# Altium PCB TXW827-RGB888_GQ_XC001 V2.0.PcbDoc (part 1 of 2)
Units mm, origin at the board's own origin, x right, y up, seen from the top; angles counter-clockwise.
Board outline 100 x 93.19 mm, 2 copper layers (Top Layer, Bottom Layer); 214 components, 136 nets, 624 pads, 441 vias.
Unrouted connection lines stored in the file: 170.
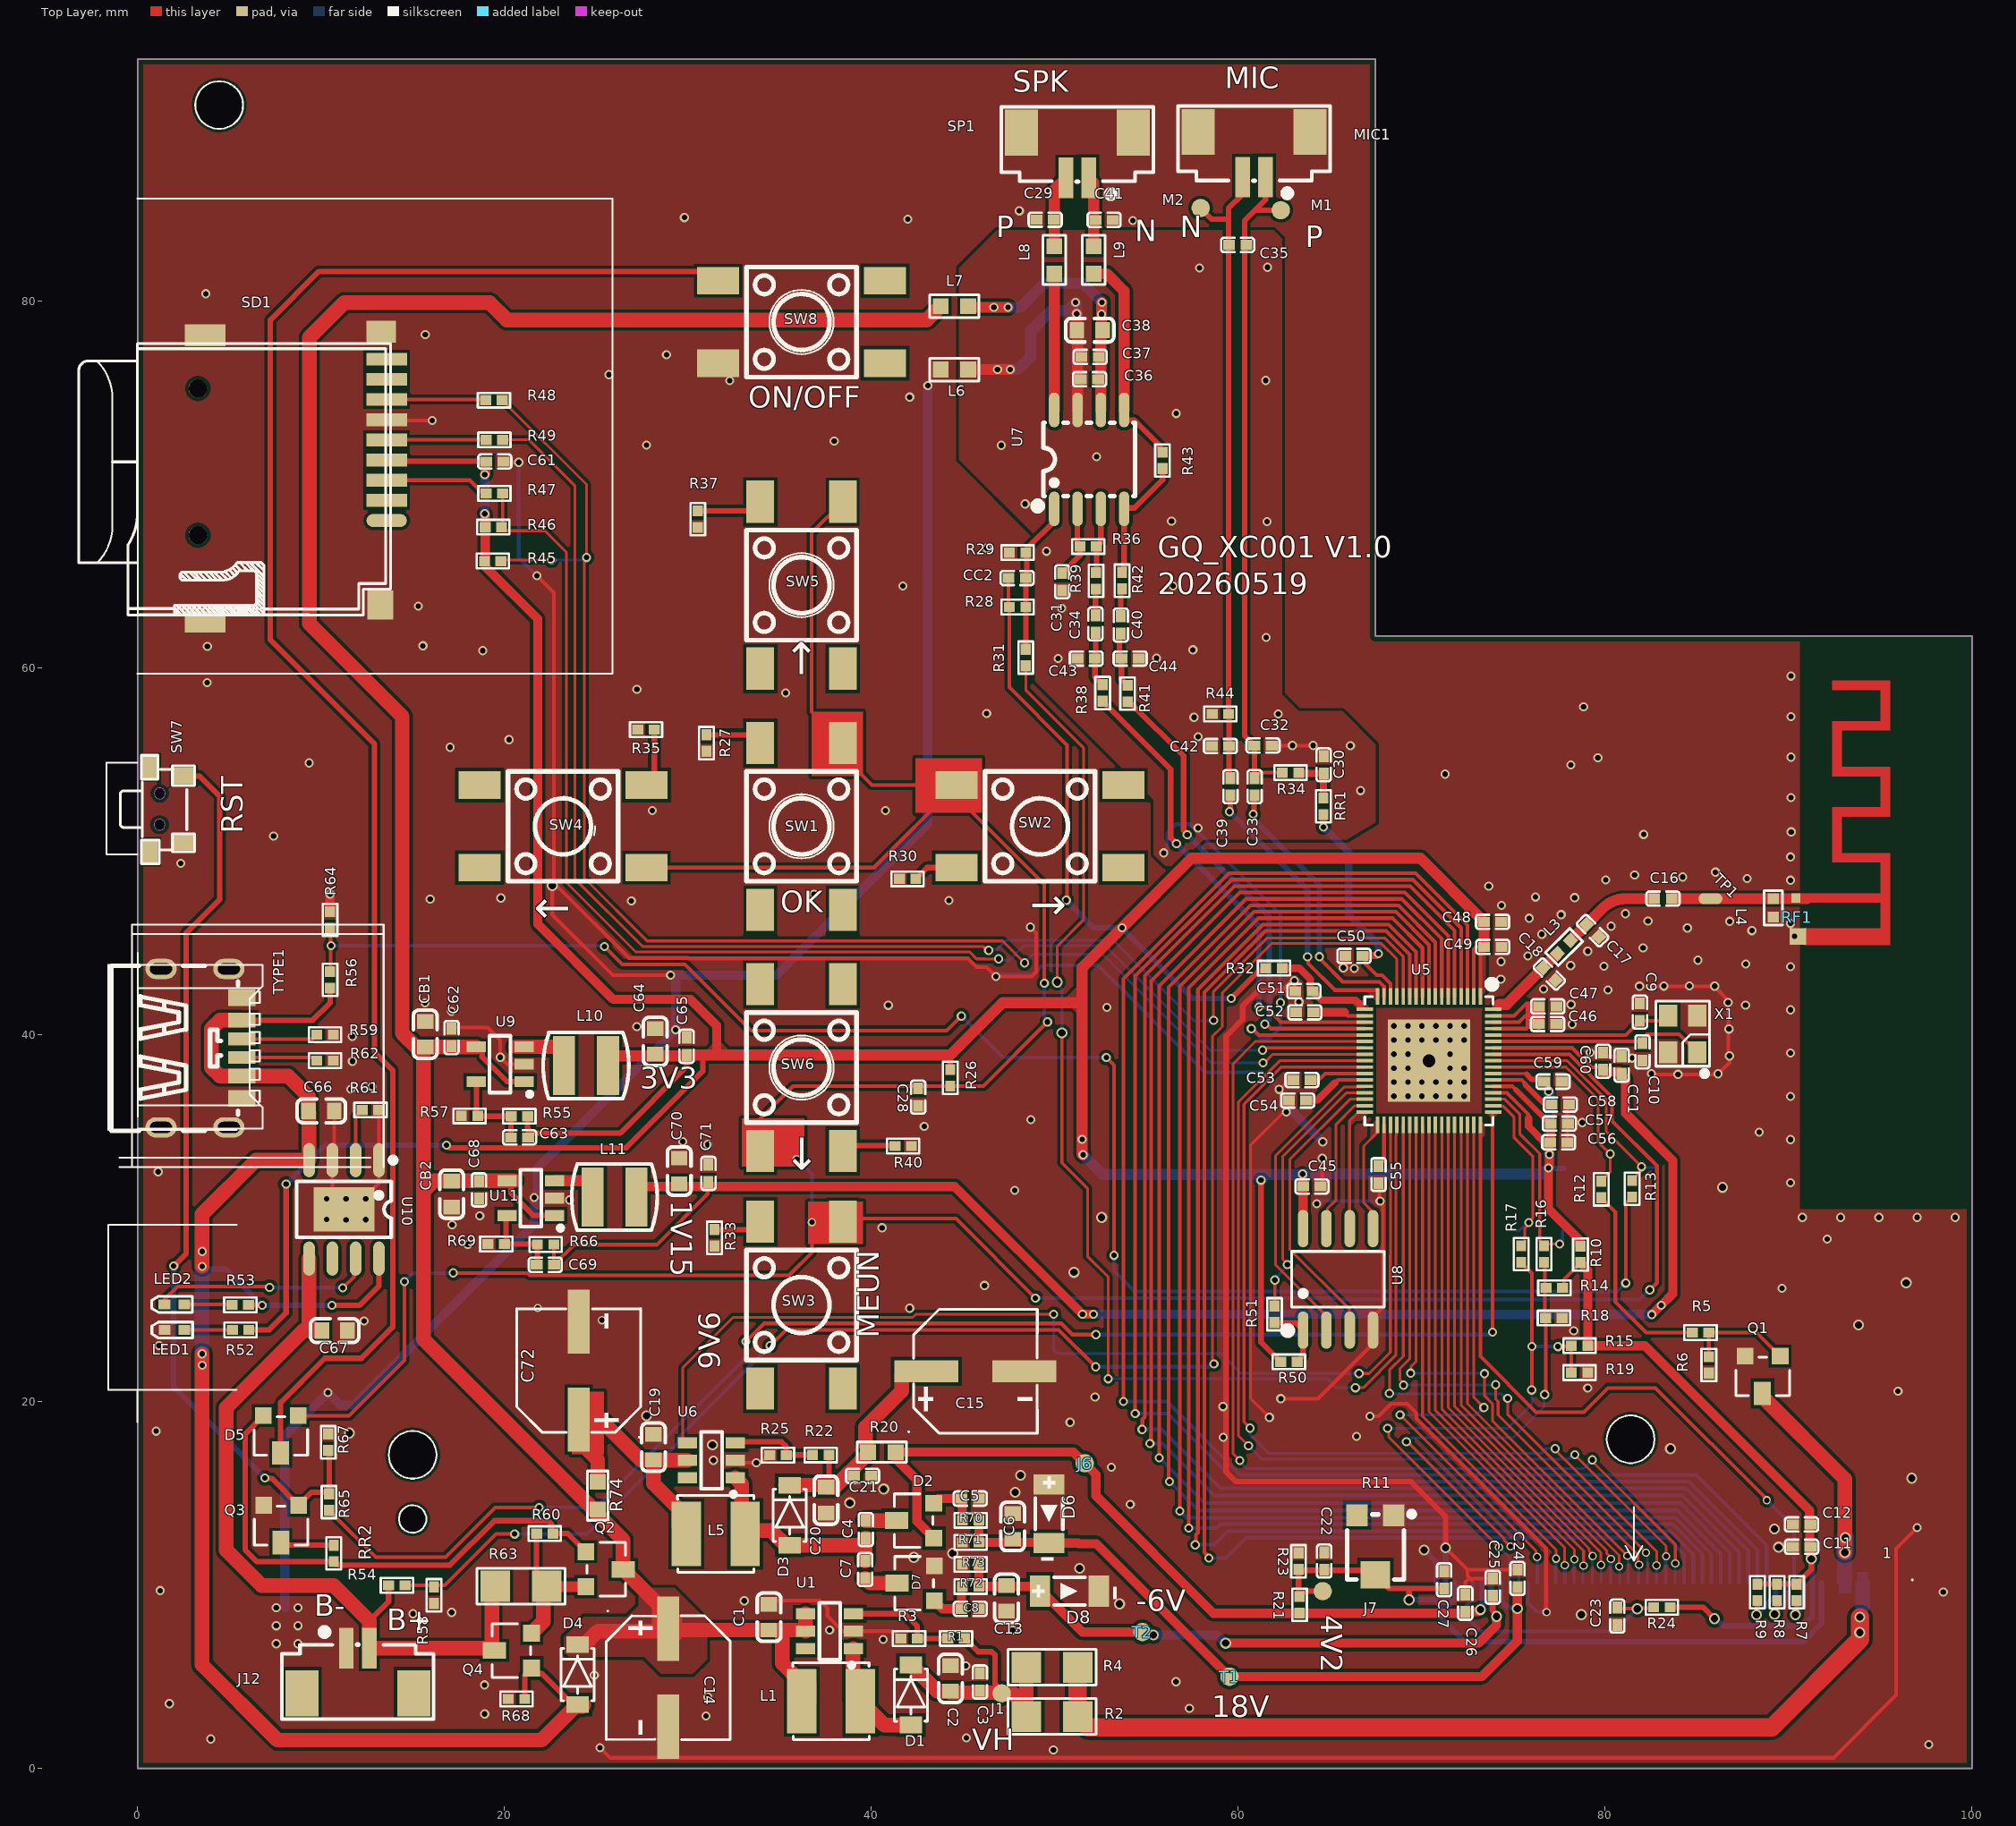
[diagram p0: Top Layer view]
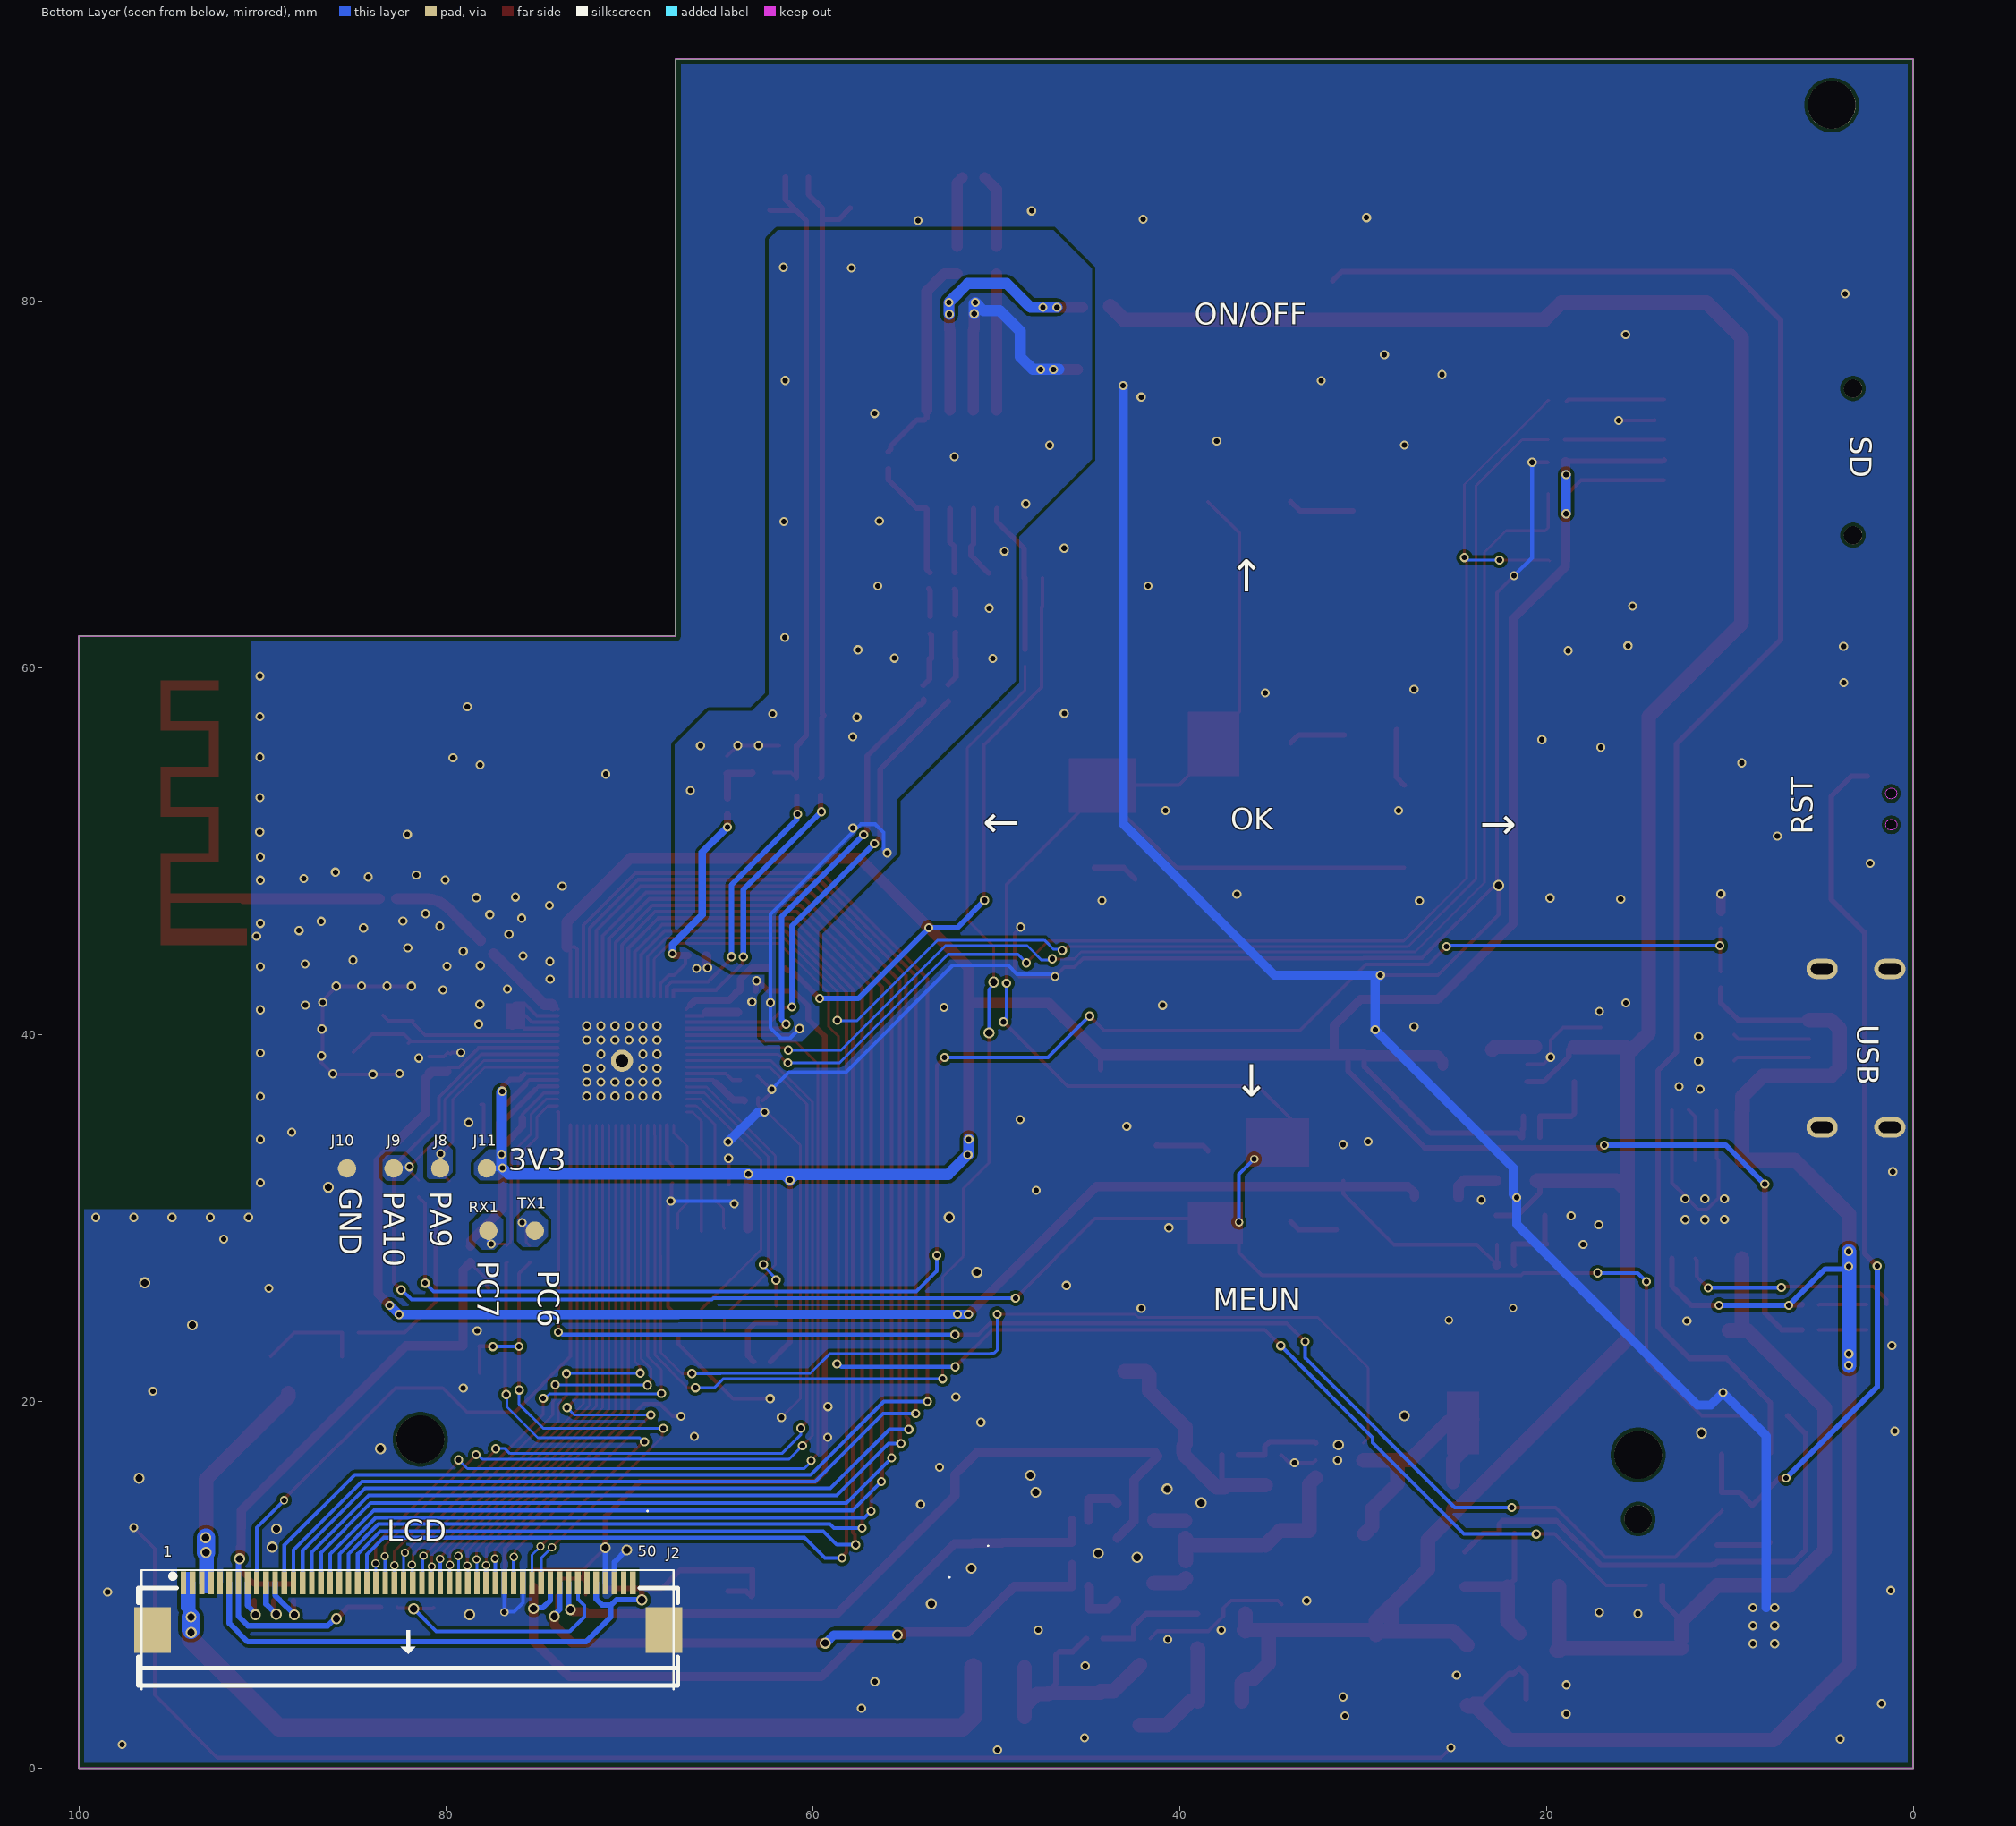
[diagram p1: Bottom Layer view, seen from below]
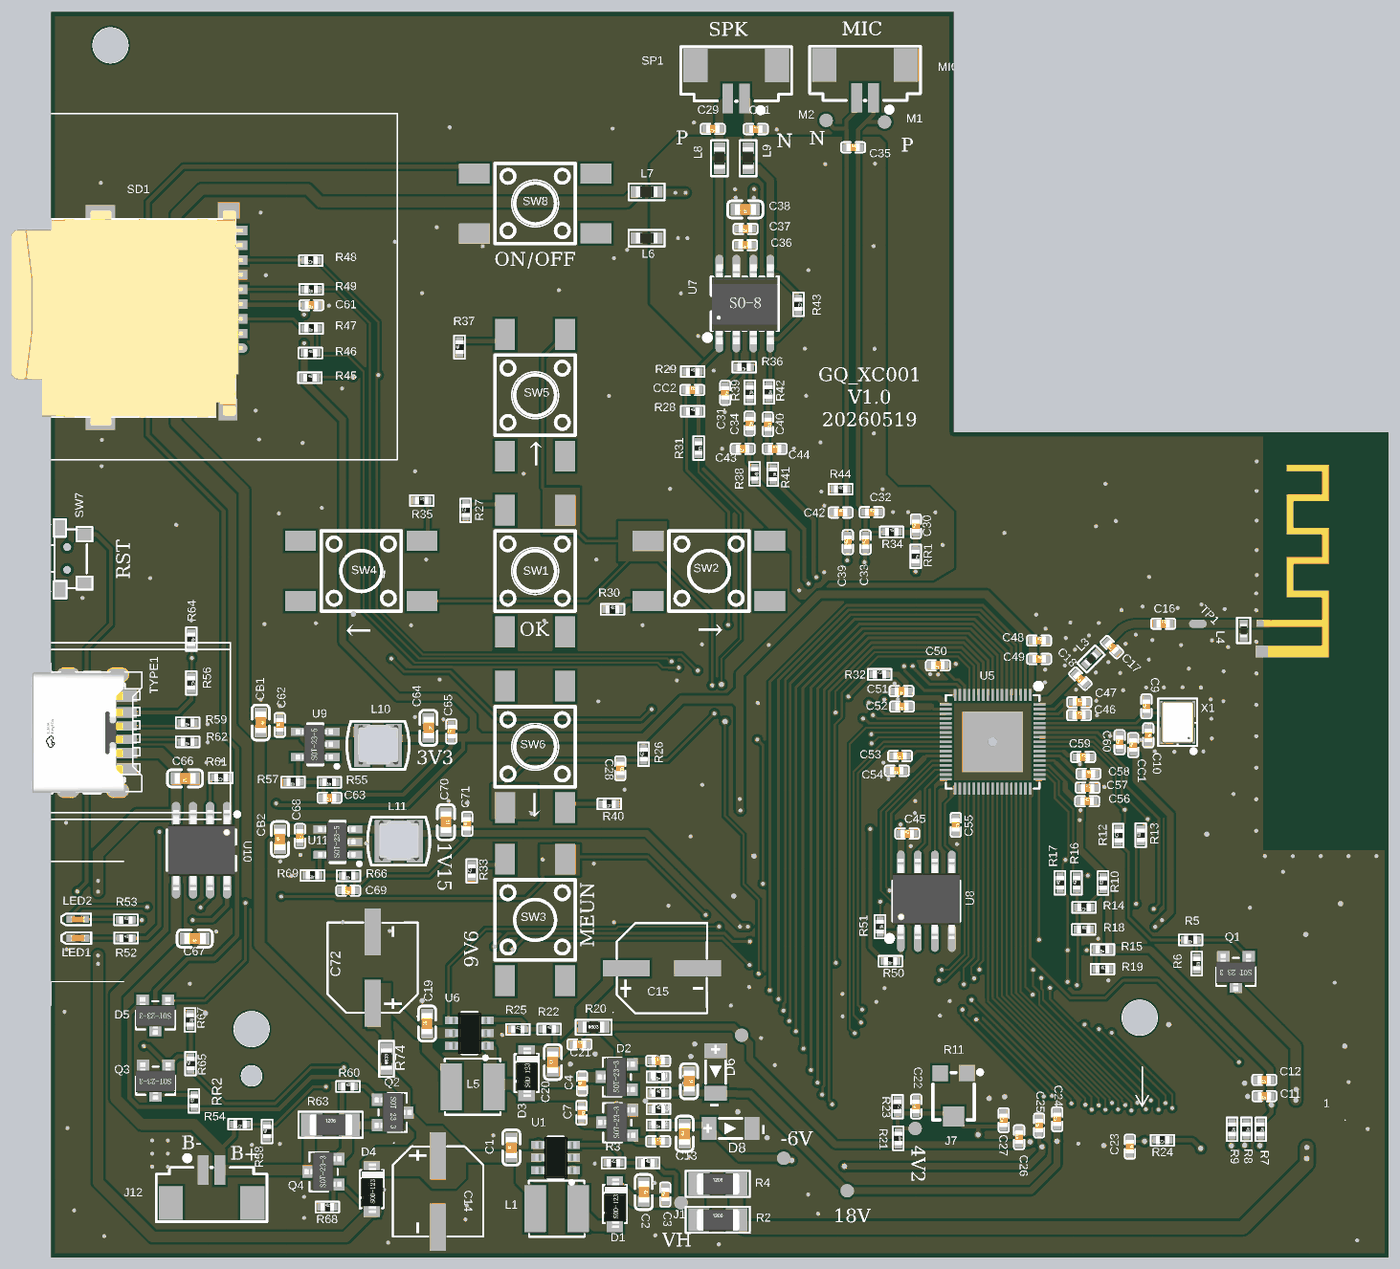
[diagram p3: 3D render of the assembled board from above, using the file's embedded part models]

## Layer stack, top to bottom
Top Solder: solder mask 0.0102, Solder Resist, Dk 3.5
Top Layer: signal copper 0.0356
Dielectric 1: dielectric 0.32, FR-4, Dk 4.8
Bottom Layer: signal copper 0.0356
Bottom Solder: solder mask 0.0102, Solder Resist, Dk 3.5

## Board outline
0,0 100,0 100,61.739 67.472,61.739 67.472,93.191 0,93.191

## Design rules (kind name [scope] priority, off if disabled: settings)
BoardOutlineClearance 铜到板边 [InNet('GND')] p1: gap=0.3 ignorepadtopadclearanceinfootprint=FALSE
Clearance 天线阻抗匹配-50Ω-2 [InNet('ANT2') vs InNet('GND')] p1: gap=0.14 ignorepadtopadclearanceinfootprint=TRUE
Clearance 天线阻抗匹配-50Ω-1 [InNet('ANT1') vs InNet('GND')] p2: gap=0.14 ignorepadtopadclearanceinfootprint=TRUE
Clearance 天线阻抗匹配-50Ω [InNet('ANT') vs InNet('GND')] p3: gap=0.14 ignorepadtopadclearanceinfootprint=FALSE // ANT_1mm板厚
Clearance 覆铜间距Clearance [InPolygon] p4: gap=0.18 ignorepadtopadclearanceinfootprint=FALSE
Clearance Clearance全局间距设置 [All] p5: gap=0.15 ignorepadtopadclearanceinfootprint=TRUE
Creepage 爬电间距 [All] p1: checkdistance=0.254
DiffPairsRouting [All] p1: maxlimit=0.5 minlimit=0.1 mostfreqgap=0.15 toplayer_minwidth=0.1 toplayer_maxwidth=0.5 toplayer_prefwidth=0.15 bottomlayer_minwidth=0.1 bottomlayer_maxwidth=0.5 bottomlayer_prefwidth=0.15 maxuncoupledlength=12.7
HoleSize [All] p1: absolutevalues=TRUE maxlimit=6 minlimit=0.1 maxpercent=80.000 minpercent=20.000
MinimumSolderMaskSliver [All] p1: minsoldermaskwidth=0.1
PlaneClearance [All] p1: clearance=0.254
PlaneConnect [All] p1: planeconnectstyle=Direct reliefexpansion=0.508 reliefentries=4 reliefconductorwidth=0.254 reliefairgap=0.254
PolygonConnect [All] p1: connectstyle=Direct reliefconductorwidth=0.254 reliefentries=4 polygonreliefangle="90 Angle" airgapwidth=0.254
RoutingCorners 线弯RoutingCorners [All] p1: cornerstyle=45-Degree minsetback=2.54 maxsetback=2.54
RoutingTopology 飞线拓扑结构RoutingTopology [All] p1: topology=Shortest
RoutingVias 过孔RoutingVias [All] p1: holewidth=0.3 width=0.5 viastyle="Through Hole" minholewidth=0.2 minwidth=0.3 maxholewidth=6 maxwidth=6
SilkToSilkClearance [All] p1: silktosilkclearance=0
SilkToSolderMaskClearance [IsPad] p1: minsilkscreentomaskgap=0 clearancetoexposedcopper=TRUE
SolderMaskExpansion [InPadClass('All Pads')] p1: expansion=0.05 istentingtop=FALSE soldermaskfromhole=TRUE
UnRoutedNet 检查不完全连接UnRoutedNet [All] p1: checkbadconnections=TRUE
Width 线宽Width [All] p1: maxlimit=10 minlimit=0.01 preferedwidth=0.15
20 further rules are at their usual default settings.

## Components (designator, comment, footprint, x,y, rotation, side; value= is the part's Value field where it differs from the comment)
C1 "22uF" C0603 34.418,8.238 r90 top value=100nF
C2 "22uF 25V" C0603 44.312,4.902 r270 top value=100nF
C3 "0.1uF" C0402#1 45.915,4.708 r90 top
C4 "0.1uF" C0402#1 39.691,13.023 r90 top
C5 "1uF" C0402#1 45.386,14.709 r0 top
C6 "10uF 25V" C0603 47.699,13.189 r270 top value=100nF
C7 "0.1uF" C0402#1 39.659,10.839 r270 top
C8 "1uF" C0402#1 45.386,8.696 r0 top
C9 "15PF" C0402#1 81.894,41.235 r90 top
C10 "15PF" C0402#1 82.032,39.066 r270 top
C11 "10uF" C0402#1 90.708,13.296 r180 top
C12 "0.1uF" C0402#1 90.713,12.077 r180 top
C13 "10uF 25V" C0603 47.366,9.265 r90 top value=100nF
C14 "100uF 10V" CAP-SMD_BD6.3-L6.6-W6.6-FD 28.926,4.94 r270 top
C15 "47uF 16V" CAP-SMD_BD6.3-L6.6-W6.6-FD 45.666,21.65 r0 top
C16 "15PF" C0402#2 83.155,47.42 r0 top
C17 "0.5PF" C0402#2 79.314,45.673 r135 top
C18 "0.5PF" C0402#2 76.957,43.309 r135 top
C19 "22uF" C0603 28.112,17.51 r90 top value=100nF
C20 "10uF 25V" C0603 37.522,14.622 r90 top value=100nF
C21 "0.1uF" C0402#1 39.515,15.95 r0 top
C22 "1uF" C0402#1 64.681,11.3 r90 top
C23 "4.7uF" C0402#1 80.662,8.299 r270 top
C24 "0.1uF" C0402#1 75.222,10.351 r90 top
C25 "0.1uF" C0402#1 73.874,9.876 r90 top
C26 "0.1uF" C0402#1 72.372,9.001 r90 top
C27 "0.1uF" C0402#1 71.222,10.276 r90 top
C28 "102" C0402#1 42.547,36.598 r270 top
C29 "TBD" C0402#1 49.471,84.436 r180 top
C30 "10uF" C0402#1 64.655,54.715 r90 top
C31 "1uF" C0402#1 50.4,64.695 r270 top
C32 "15pF" C0402#1 61.349,55.768 r0 top
C33 "1uF" C0402#1 60.892,53.522 r90 top
C34 "1uF" C0402#1 52.215,62.398 r270 top
C35 "NC" C0402#1 59.966,83.063 r0 top
C36 "0.1uF" C0402#1 51.889,75.742 r180 top
C37 "1uF" C0402#1 51.92,76.958 r180 top
C38 "22uF" C0603 51.899,78.417 r180 top
C39 "1uF" C0402#1 59.568,53.522 r90 top
C40 "1uF" C0402#1 53.596,62.338 r270 top
C41 "TBD" C0402#1 52.684,84.428 r0 top
C42 "15PF/TBD" C0402#1 59.026,55.74 r0 top
C43 "TBD" C0402#1 51.71,60.512 r180 top
C44 "TBD" C0402#1 54.105,60.512 r0 top
C45 "1uF" C0402#1 64.013,31.725 r0 top
C46 "10uF" C0402#1 76.862,40.581 r0 top
C47 "0.1uF" C0402#1 76.871,41.543 r0 top
C48 "10uF" C0402#1 73.863,46.154 r0 top
C49 "0.1uF" C0402#1 73.871,44.785 r0 top
C50 "1uF" C0402#1 66.307,44.3 r180 top
C51 "1uF" C0402#1 63.576,42.376 r180 top
C52 "1uF" C0402#1 63.622,41.219 r180 top
C53 "1uF" C0402#1 63.468,37.527 r180 top
C54 "10uF" C0402#1 63.232,36.416 r180 top
C55 "1uF" C0402#1 67.644,32.371 r270 top
C56 "1uF" C0402#1 77.465,34.134 r0 top
C57 "1uF" C0402#1 77.503,35.155 r0 top
C58 "1uF" C0402#1 77.556,36.194 r0 top
C59 "1uF" C0402#1 77.158,37.441 r0 top
C60 "1uF" C0402#1 79.89,38.555 r90 top
C61 "0.1uF" C0402#1 19.466,71.256 r180 top
C62 "0.1uF" C0402#1 17.106,39.849 r90 top
C63 "22PF" C0402#1 20.817,34.402 r180 top
C64 "22uF" C0603 28.215,39.635 r270 top
C65 "0.1uF" C0402#1 29.924,39.366 r90 top
C66 "10uF" C0603 10.011,35.85 r180 top
C67 "10uF" C0603 10.737,23.868 r180 top
C68 "0.1uF" C0402#1 18.607,31.541 r270 top
C69 "22PF" C0402#1 22.221,27.456 r180 top
C70 "22uF" C0603 29.518,32.569 r270 top
C71 "0.1uF" C0402#1 31.112,32.438 r90 top
C72 "100uF 10V" CAP-SMD_BD6.3-L6.6-W6.6-FD 24.042,21.688 r90 top
CB1 "22uF" C0603 15.671,40.027 r270 top
CB2 "22uF" C0603 17.117,31.305 r90 top
CC1 "10uF" C0402#1 80.897,38.34 r90 top
CC2 "0.1uF" C0402#1 47.942,64.903 r0 top
D1 "1N5819W" SOD-123 42.156,2.363 r90 top
D2 "BAT54S_KL4" SOT23-3 42.384,13.505 r90 top
D3 "1N5819W" SOD-123 35.549,12.163 r90 top
D4 "NC" SOD-123 23.974,3.48 r90 top
D5 "BAT54C" SOT-23 7.801,18.211 r180 top
D6 "LL4148" LL-34_L3.5-W1.5-RD 49.68,13.88 r90 top
D7 "BAT54S_KL4" SOT23-3 42.419,10.087 r90 top
D8 "LL4148" LL-34_L3.5-W1.5-RD 50.797,9.658 r180 top
J1 "TP" TP_1.0MM#1 47.1,4.09 r0 top
J2 "FPC50 0.5mm 翻盖下接" FPC-SMD_50P-P0.50_FPC-05F-50PH20 82.047,8.826 r180 bottom locked
J6 "TP" TP_1.0MM#1 51.627,16.632 r0 top
J7 "TP" TP_1.0MM#1 64.604,9.657 r0 top
J8 "TP" TP_1.0MM#1 80.303,32.709 r180 bottom
J9 "TP" TP_1.0MM#1 82.843,32.709 r180 bottom
J10 "TP" TP_1.0MM#1 85.383,32.709 r180 bottom
J11 "TP" TP_1.0MM#1 77.763,32.709 r180 bottom
J12 "立贴座子1.25脚距2P" CONN-SMD_2P-P1.25-HC-1.25-2PLT 11.998,5.32 r0 top
L1 "4.7UH" L-IND-SMD_L4.0-W4.0 37.802,3.655 r0 top value=1uH
L3 "2.2nH" L0402 77.756,44.783 r225 top
L4 "27nH" L0402 89.167,46.913 r90 top
L5 "4.7UH" L-IND-SMD_L4.0-W4.0 31.511,12.779 r0 top value=1uH
L6 "0R" L0603 44.525,76.267 r0 top value=1uH
L7 "1R" L0603 44.525,79.729 r0 top value=1uH
L8 "600R@100M" L0603 49.975,82.242 r90 top value=1uH
L9 "600R@100M" L0603 52.114,82.242 r90 top value=1uH
L10 "2.2uH" L-IND-SMD_L3.0-W3.0 24.44,38.319 r0 top
L11 "2.2uH" L-IND-SMD_L3.0-W3.0 25.99,31.148 r0 top
LED1 "RED" LED0402 2.006,23.898 r180 top
LED2 "BL" LED0402 1.993,25.296 r180 top
M1 "M+" TP_1.0MM#2 62.483,84.939 r0 top
M2 "M-" TP_1.0MM#1 57.946,85.077 r0 top
MIC1 "立贴座子1.25脚距2P" CONN-SMD_2P-P1.25-HC-1.25-2PLT 60.854,87.996 r180 top locked value=MIC-4013-SMT
Q1 "2300" SOT-23 88.586,21.459 r180 top
Q2 "AO3401" SOT-23 25.449,10.858 r270 top
Q3 "S8050" SOT23 7.819,13.321 r180 top
Q4 "NC" SOT-23 20.457,6.417 r90 top
R1 "150K ±1%" R0402 44.614,7.081 r0 top
R2 "NC" R1206 49.847,2.821 r0 top
R3 "10K ±1%" R0402 42.049,7.077 r0 top
R4 "2.2R" R1206 49.847,5.503 r0 top
R5 "1K" R0402 85.199,23.762 r180 top
R6 "10K" R0402 85.653,21.993 r270 top
R7 "10K" R0402 90.44,9.594 r270 top
R8 "10K" R0402 89.369,9.594 r270 top
R9 "10K" R0402 88.299,9.594 r270 top
R10 "0R" R0402 78.651,28.019 r90 top
R11 "ADJ 303-14/NC" RES-ADJ-SMD_303-14 67.476,12.174 r180 top
R12 "330R" R0402 79.785,31.567 r90 top
R13 "330R" R0402 81.467,31.599 r90 top
R14 "10K" R0402 77.228,26.195 r180 top
R15 "NC" R0402 78.604,23.041 r180 top
R16 "NC" R0402 76.664,28.038 r90 top
R17 "NC" R0402 75.427,28.039 r90 top
R18 "NC" R0402 77.204,24.555 r0 top
R19 "10K" R0402 78.604,21.576 r0 top
R20 "0R" R0603 40.567,17.239 r0 top
R21 "13K3 ±1%" R0402 63.338,8.918 r270 top
R22 "150K  ±1%" R0402 37.239,17.085 r0 top
R23 "10K ±1%" R0402 63.284,11.291 r270 top
R24 "10K" R0402 83.092,8.783 r180 top
R25 "10K ±1%" R0402 34.905,17.074 r0 top
R26 "20K ±1%" R0402 44.301,37.646 r90 top
R27 "5K1 ±1%" R0402 31.004,55.899 r90 top
R28 "NC" R0402 47.966,63.319 r0 top
R29 "100K" R0402 47.972,66.286 r0 top
R30 "13K3 ±1%" R0402 41.973,48.496 r0 top
R31 "NC" R0402 48.415,60.562 r270 top
R32 "0R" R0402 61.945,43.629 r0 top
R33 "20k ±1%" R0402 31.449,28.924 r90 top
R34 "2K2" R0402 62.847,54.288 r0 top
R35 "30k ±1%" R0402 27.713,56.635 r0 top
R36 "20K" R0402 51.818,66.62 r180 top
R37 "47k ±1%" R0402 30.535,68.114 r90 top
R38 "1K" R0402 52.603,58.634 r270 top
R39 "20K" R0402 52.24,64.745 r270 top
R40 "75K ±1%" R0402 41.729,33.934 r180 top
R41 "1K" R0402 53.967,58.598 r270 top
R42 "20K" R0402 53.666,64.754 r270 top
R43 "62K" R0402 55.868,71.313 r270 top
R44 "2K2" R0402 59.024,57.491 r0 top
R45 "5K1" R0402 19.353,65.826 r0 top
R46 "5K1" R0402 19.388,67.678 r0 top
R47 "22R" R0402 19.445,69.51 r180 top
R48 "22R" R0402 19.421,74.598 r180 top
R49 "22R" R0402 19.445,72.434 r180 top
R50 "10K" R0402 62.757,22.166 r180 top
R51 "330R" R0402 61.975,24.756 r270 top
R52 "1K" R0402 5.607,23.906 r0 top
R53 "1K" R0402 5.595,25.266 r0 top
R54 "1M±1%" R0402 14.129,9.971 r180 top
R55 "100K ±1%" R0402 20.805,35.552 r180 top
R56 "1M±1%" R0402 10.484,42.992 r270 top
R57 "22.1K ±1%" R0402 18.093,35.569 r180 top
R58 "1M±1%" R0402 16.147,9.437 r90 top
R59 "5K1" R0402 10.211,40.005 r180 top
R60 "100K" R0402 22.194,12.8 r0 top
R61 "1.5K" R0402 12.691,35.895 r180 top
R62 "5K1" R0402 10.211,38.583 r180 top
R63 "0R" R1206 20.893,9.929 r0 top
R64 "1M±1%" R0402 10.484,46.26 r270 top
R65 "1K" R0402 10.427,14.514 r90 top
R66 "100K ±1%" R0402 22.24,28.561 r180 top
R67 "10K" R0402 10.389,17.779 r270 top
R68 "NC" R0402 20.655,3.779 r0 top
R69 "100K ±1%" R0402 19.545,28.588 r180 top
R70 "1K  ±1%" R0402 45.408,13.52 r180 top
R71 "20K ±1%" R0402 45.408,12.317 r0 top
R72 "5K1 ±1%" R0402 45.408,9.912 r180 top
R73 "10K ±1%" R0402 45.408,11.114 r0 top
R74 "1R5" R0603 25.079,14.867 r90 top
RF1 "SP-RF-001" ANT2_PCB_2.4G_5.4X14.4mm 90.395,47.451 r180 top
RR1 "0R" R0402 64.645,52.455 r270 top
RR2 "100R" R0402 10.685,11.717 r90 top
RX1 "TP" TP_1.0MM#3 77.143,29.181 r180 bottom
SD1 "JSD13PCS" SD_TFCARD 13.576,68.034 r270 top
SP1 "立贴座子1.25脚距2P" CONN-SMD_2P-P1.25-HC-1.25-2PLT 51.226,87.95 r180 top locked
SW1 "圆形按钮金属头 防水 SMD 4*4" SW-SMD_4P-L6.0-W6.0-P4.50-LS9.0_H5.0 36.189,51.361 r270 top
SW2 "圆形按钮金属头 防水 SMD 4*4" SW-SMD_4P-L6.0-W6.0-P4.50-LS9.0_H5.0 49.189,51.361 r0 top
SW3 "圆形按钮金属头 防水 SMD 4*4" SW-SMD_4P-L6.0-W6.0-P4.50-LS9.0_H5.0 36.189,25.261 r270 top
SW4 "圆形按钮金属头 防水 SMD 4*4" SW-SMD_4P-L6.0-W6.0-P4.50-LS9.0_H5.0 23.189,51.361 r180 top locked
SW5 "圆形按钮金属头 防水 SMD 4*4" SW-SMD_4P-L6.0-W6.0-P4.50-LS9.0_H5.0 36.189,64.511 r270 top
SW6 "圆形按钮金属头 防水 SMD 4*4" SW-SMD_4P-L6.0-W6.0-P4.50-LS9.0_H5.0 36.189,38.211 r90 top
SW7 "型号TS24CA 250gf 013_小侧按轻触开关3.5x4.7x2.3侧贴260gf带固定柱" "SW1-2x4小侧按-TS24CA 250gf 013" 1.575,52.273 r270 top
SW8 "圆形按钮金属头 防水 SMD L5.1*W5.1*H2.5mm" SW-SMD_4P-L6.0-W6.0-P4.50-LS9.0_H5.0 36.189,78.861 r0 top locked
T1 "18V" TP_1.0MM#1 59.521,4.995 r0 top
T2 "-6V" TP_1.0MM#1 54.775,7.429 r0 top
TP1 "ANT" TP_1.0MM#4 85.741,47.413 r315 top
TX1 "TP" TP_1.0MM#1 75.139,29.314 r180 bottom
TYPE1 "TYPE-C座子-6PIN-卧贴-4定位脚" TYPE-C-SMD_TYPE-C-31-M-16 -1.43,39.266 r270 top
U1 "MT3608L" SOT-23-6 37.717,7.478 r180 top
U5 "TXW827-C08" TXW827-C08 70.394,38.583 r270 top
U6 "MT3608L" SOT-23-6 31.274,16.795 r180 top
U7 "8002D" SOP-8 51.868,71.369 r90 top
U8 "PY25D32SH SOP8 150mil" SOP-8_L5.0-W4.0-P1.27-LS6.0-BL 65.509,26.717 r90 top
U9 "TM108J" SOT-23-5 21.061,37.443 r180 top
U10 "TP4056" ESOP-8 11.246,30.475 r270 top
U11 "TM108J" SOT-23-5 22.736,30.142 r180 top
X1 "40MHz/Y3225 5ppm,温补,负载15pF" 晶振SMD-Y3225_4P 84.225,40.046 r90 top

## Footprints (in the part's own frame and the unit in brackets; to place one, negate y for a bottom-side part, rotate by r counter-clockwise, add the part's x,y. Pads: shape width x height; smd on the part's side, far side on the other; paste and mask are expansions set on the pad)
ANT2_PCB_2.4G_5.4X14.4mm [mm] "ANT2板载天线"
  rect 0.5x0.5 smd mask+0.01: 1(0,0.001)
  rect 0.9x0.9 smd mask+0.01: 2(-0.123,2.102)
  Top Layer pour cut-out: -5.856,-14.263 -0.228,-14.263 -0.228,4.188 -5.856,4.188
  Top Layer region: -1.992,-11.349 -1.992,-11.849 -4.632,-11.849 -4.632,-11.349 -1.992,-11.349
  Top Layer region: -1.992,-9.149 -1.992,-9.649 -4.632,-9.649 -4.632,-11.849 -5.132,-11.849 -5.132,-9.149 -1.992,-9.149
  Top Layer region: -1.993,-6.669 -1.993,-9.151 -2.493,-9.151 -2.493,-6.669 -1.993,-6.669
  Top Layer region: -1.992,-6.649 -1.992,-7.149 -4.632,-7.149 -4.632,-6.649 -1.992,-6.649
  Top Layer region: -4.632,-4.449 -4.632,-7.149 -5.132,-7.149 -5.132,-4.449 -4.632,-4.449
  Top Layer region: -1.992,-4.449 -1.992,-4.949 -4.632,-4.949 -4.632,-4.449 -1.992,-4.449
  Top Layer region: -1.992,-2.449 -1.992,-4.449 -2.492,-4.449 -2.492,-2.449 -1.992,-2.449
  Top Layer region: -1.992,-1.949 -1.992,-2.449 -4.632,-2.449 -4.632,-1.949 -1.992,-1.949
  Top Layer region: -4.632,2.551 -4.632,-2.449 -5.132,-2.449 -5.132,2.551 -4.632,2.551
  Top Layer region: -0.454,2.551 -0.454,1.651 -4.632,1.651 -4.632,2.551
  Top Layer region: -0.194,-0.249 -4.632,-0.249 -4.632,0.251 -0.194,0.251
  Bottom Layer pour cut-out: -5.856,-14.263 -0.228,-14.263 -0.228,4.188 -5.856,4.188
C0402#1 [mm] "贴片电容"
  rrect0% 0.65x0.54 smd mask+0.01: 1(-0.475,0) 2(0.475,0)
  silkscreen extent -0.9,-0.39 0.9,0.39, body extent -0.5,-0.3 0.5,0.3, height 0.2
C0402#2 [mm] "贴片电容"
  rrect0% 0.6x0.6 smd mask+0.01: 1(-0.475,0) 2(0.475,0)
  silkscreen extent -0.9,-0.39 0.9,0.39, body extent -0.5,-0.3 0.5,0.3, height 0.2
C0603 [mm] "贴片电容"
  rect 0.8x0.9 smd mask+0.01: 1(-0.7,0) 2(0.7,0)
  silkscreen extent -1.32,-0.64 1.32,0.64, body extent -0.81,-0.39 0.79,0.41, height 0.3
CAP-SMD_BD6.3-L6.6-W6.6-FD [mm] ";SMD;SMD,D6.3xL6.1mm;SMD,D6.3xL8mm;SMD,D6.3xL7.7mm;SMD,D6.3xL5.8mm;SMD,D6.3xL5.5mm;SMD,D6.3xL4.7mm;SMD,D6.3xL5.4mm;SMD,D6.3xL8.7mm;SMD,6.3x7.7mm;SMD,6.3x5.8mm;SMD,6.3x5.4mm;SMD,D6.3xL5mm;SMD,6.3x8mm;SMD,D6.3xL5.9mm;SMD,D6.3xL6mm;SMD,D6.3xL5.2mm;SMD,D6.3xL10.2mm;SMD,D6.3xL10.5mm;SMD,D6.3xL5.7mm;SMD,D6.3xL5.3mm;-;SMD,D6.3xL4.4mm;SMD,6x6.3mm;SMD,D6.3xL7.5mm;SMD,D6.3xL10mm;SMD,D6.3xL12mm;SMD,6.3x5.7mm;SMD,D6.3xL9.7mm;SMD,D6.3xL4.3mm;SMD,D6.3xL9.9mm;SMD,D6.3xL4.2mm;SMD,D6.3xL9mm;SMD,D6.3xL4.5mm;SMD,5.9x6.3mm;SMD,D6.3xL7mm;SMD,D6.3xL3.9mm;SMD,6.3x5.7 6.3x5.8mm;SMD,6.3x5.3mm;6.3*5.3;SMD,6.3X5.7mm;SMD,6.3*7.7mm;SMD,6.3x5.9mm;6.3x7.7;插件,6.3x7mm;SMD,6.3x10mm;6.3X7.7SMD;CAP-SMD_BD6.3-L6.6-W6.6-FD;CAP-SMD_L6.3-W6.3;CAP-SMD;100UF/25V;CAP-SMD_6.3X5.4;CAP-SMD-2P;SMD,6.3x7.9mm;CAP-SMD_BD6.3;SMD,,D6.3XL7.7;CAP-SMD_D6.3"
  rect 3.5x1.2 smd mask+0.01: 1(-2.67,0) 2(2.67,0)
  silkscreen extent -3.69,-3.38 3.38,3.38
CONN-SMD_2P-P1.25-HC-1.25-2PLT [mm] "SMD_2P-P1.25-HC-1.25-2PLT"
  rect 0.8x2.2 smd paste+0 mask+0.01: 1(-0.625,1.23) 2(0.625,1.23)
  rect 1.8x2.5 smd paste+0 mask+0.01: 3(3.05,-1.23) 4(-3.05,-1.23)
  silkscreen extent -4.14,-2.64 4.14,2.29, body extent -3.56,-2.5 3.74,1.8, height 4.71
ESOP-8 [mm] "ESOP-8_L4.9-W3.9-P1.27-LS6.0-BL-EP"
  oval 1.865x0.63 smd: 1(-2.682,1.905) 2(-2.682,0.635) 3(-2.682,-0.635) 4(-2.682,-1.905) 5(2.682,-1.905) 6(2.682,-0.635) 7(2.682,0.635) 8(2.682,1.905)
  rect 2.4x3.3 smd mask+0.01: 9(0,0)
  silkscreen extent -2.83,-2.58 1.52,2.82, body extent -3,-2.5 3,2.5, height 1.8
FPC-SMD_50P-P0.50_FPC-05F-50PH20 [mil] "FPC-SMD_0.5mm-50P  卧贴"
  rect 11.8x49.2 smd paste+0 mask+2: 1(-482.3,50.7) 2(-462.6,50.7) 3(-442.9,50.7) 4(-423.2,50.7) 5(-403.5,50.7) 6(-383.9,50.7) 7(-364.2,50.7) 8(-344.5,50.7) 9(-324.8,50.7) 10(-305.1,50.7) 11(-285.4,50.7) 12(-265.8,50.7) 13(-246.1,50.7) 14(-226.4,50.7) 15(-206.7,50.7) 16(-187,50.7) 17(-167.3,50.7) 18(-147.6,50.7) 19(-128,50.7) 20(-108.3,50.7) 21(-88.6,50.7) 22(-68.9,50.7) 23(-49.2,50.7) 24(-29.5,50.7) 25(-9.9,50.7) 26(9.8,50.7) 27(29.5,50.7) 28(49.2,50.7) 29(68.9,50.7) 30(88.6,50.7) 31(108.3,50.7) 32(128,50.7) 33(147.6,50.7) 34(167.3,50.7) 35(187,50.7) 36(206.7,50.7) 37(226.4,50.7) 38(246.1,50.7) 39(265.7,50.7) 40(285.4,50.7) 41(305.1,50.7) 42(324.8,50.7) 43(344.5,50.7) 44(364.2,50.7) 45(383.9,50.7) 46(403.5,50.7) 47(423.2,50.7) 48(442.9,50.7) 49(462.6,50.7) 50(482.3,50.7)
  rect 78.7x98.4 smd paste+0 mask+2: 51(-548.8,-50.7) 52(548.8,-50.7)
  silkscreen extent -579,-170 579,70
L0402 [mm] "贴片电感"
  rect 0.6x0.6 smd mask+0.01: 1(-0.5,0) 2(0.5,0)
  silkscreen extent -0.94,-0.5 0.94,0.5, body extent -0.5,-0.25 0.5,0.25, height 0.3
L0603 [mm]
  rect 0.864x0.864 smd mask+0.01: 1(-0.753,0) 2(0.754,0)
  silkscreen extent -1.34,-0.62 1.34,0.62, body extent -0.79,-0.39 0.81,0.41, height 0.4
L-IND-SMD_L3.0-W3.0 [mm] "功率电感L3*W3"
  rect 1.2x3.2 smd mask+0.01: 1(-1.2,0) 2(1.2,0)
  silkscreen extent -2.33,-1.8 2.34,1.8, body extent -1.48,-1.45 1.54,1.55, height 1.51
L-IND-SMD_L4.0-W4.0 [mm] "功率电感L4*W4"
  rect 1.6x3.5 smd mask+0.01: 1(-1.6,0) 2(1.6,0)
  silkscreen extent -2.08,-2.1 2.08,2.1, body extent -2.05,-2.11 2.08,2.08, height 2
LED0402 [mm]
  rrect0% 0.636x0.54 smd mask+0.01: 1(-0.538,0) 2(0.538,0)
  silkscreen extent -0.99,-0.43 1.23,0.43, body extent -0.51,-0.25 0.5,0.25, height 0.45
LL-34_L3.5-W1.5-RD [mm] "LL-34"
  rect 1.1x1.699 smd mask+0.01: 1(-1.599,0) 2(1.599,0)
  silkscreen extent -2.56,-0.75 2.04,0.75
R0402 [mm] "贴片电阻"
  rect 0.6x0.55 smd mask+0.01: 1(-0.45,0) 2(0.45,0)
  silkscreen extent -0.88,-0.4 0.88,0.4, body extent -0.5,-0.31 0.5,0.29, height 0.2
R0603 [mm] "贴片 电阻"
  rect 0.864x0.864 smd mask+0.01: 1(-0.753,0) 2(0.754,0)
  silkscreen extent -1.34,-0.55 1.34,0.55, body extent -0.82,-0.41 0.78,0.41, height 0.45
R1206 [mm] "贴片电阻"
  rect 1.6x1.701 smd mask+0.01: 1(-1.4,0) 2(1.4,0)
  silkscreen extent -2.4,-0.97 2.4,0.98, body extent -1.57,-0.8 1.63,0.8, height 1
RES-ADJ-SMD_303-14 [mm] "可调电阻/电位器RES-ADJ-SMD_303-14"
  rect 1.17x1.199 smd mask+0.01: 1(-1,-1.626) 3(1,-1.626)
  rect 1.6x1.501 smd mask+0.01: 2(0,1.626)
  silkscreen extent -2.13,-1.83 1.55,1.87
SD_TFCARD [mm] "SD卡槽"
  oval 0.7x2.2 smd mask+0.01: 1(0,0)
  rect 0.7x2.2 smd mask+0.01: 2(-1.1,0) 3(-2.2,0) 4(-3.3,0) 5(-4.4,0) 6(-5.5,0) 7(-6.6,0) 8(-7.7,0) 9(-8.8,0)
  rect 1.2x1.6 smd mask+0.01: 10(-10.3,-0.3)
  rect 1.2x2.2 smd mask+0.01: 11(-10.1,-9.9) 12(5.5,-9.9)
  rect 1.6x1.4 smd mask+0.01: 13(4.6,-0.35)
  round 1 hole 1 unplated mask+0.01: 14(0.8,-10.3) 15(-7.2,-10.3)
  silkscreen extent -9.65,-16.78 5.15,0.21, body extent -10.3,-16.54 5.8,0.76, height 1.85
SOD-123 [mm]
  rect 0.91x1.22 smd mask+0.01: 1(0,0) 2(3.27,0)
  silkscreen extent 0.2,-0.9 3.06,0.9, body extent -0.15,-0.85 3.55,0.75, height 1.2
SOP-8 [mm] "S08"
  oval 1.888x0.574 smd mask+0.01: 1(-2.699,1.905) 2(-2.699,0.635) 3(-2.699,-0.635) 4(-2.699,-1.905) 5(2.699,-1.905) 6(2.699,-0.635) 7(2.699,0.635) 8(2.699,1.905)
  silkscreen extent -2.7,-2.5 2,2.96, body extent -3.05,-2.45 2.95,2.45, height 1.7
SOP-8_L5.0-W4.0-P1.27-LS6.0-BL [mm] "贴片芯片S0P8"
  oval 2.036x0.574 smd mask+0.01: 1(-2.824,1.975) 2(-2.824,0.705) 3(-2.824,-0.565) 4(-2.824,-1.835) 5(2.712,-1.835) 6(2.712,-0.565) 7(2.712,0.705) 8(2.712,1.975)
  silkscreen extent -3,-2.46 1.47,2.98, body extent -2.9,-2.42 3.1,2.58, height 1.8
SOT23 [mil]
  rect 36x36 smd mask+0.39: 1(-37.5,-40) 2(37.5,-40)
  rect 36x50 smd mask+0.39: 3(0.5,40)
  silkscreen extent -58,-38 58,45, body extent -57,-50 58,60, height 47
SOT23-3 [mil]
  rect 36x36 smd mask+0.39: 1(-37.5,-40) 2(37.5,-40)
  rect 36x50 smd mask+0.39: 3(0.5,40)
  silkscreen extent -58,-38 58,45, body extent -57,-50 58,60, height 47
SOT-23 [mil] "SOT23"
  rect 36x36 smd mask+0.39: 1(-37.5,-40) 2(37.5,-40)
  rect 36x50 smd mask+0.39: 3(0.5,40)
  silkscreen extent -58,-38 58,45, body extent -57,-50 58,60, height 47
SOT-23-5 [mm] "SOT23-5"
  rect 1.05x0.6 smd mask+0.01: 1(0,0) 2(0,-0.95) 3(0,-1.9) 4(2.6,-1.9) 5(2.6,0)
  silkscreen extent -0.43,-2.5 1.88,0.81, body extent -0.03,-2.4 2.77,0.5, height 1.2
SOT-23-6 [mm] "SOT6"
  rect 1.05x0.6 smd mask+0.01: 1(-1.3,0.95) 2(-1.3,0) 3(-1.3,-0.95) 4(1.3,-0.95) 5(1.3,0) 6(1.3,0.95)
  silkscreen extent -1.32,-1.55 0.55,1.97, body extent -1.56,-1.54 1.5,1.56, height 1.45
"SW1-2x4小侧按-TS24CA 250gf 013" [mm] "侧按轻触开关2x4x3.5侧贴260gf带固定柱"
  round 0 hole 0.6 unplated mask+0.01: 0(-0.881,-0.375) 0(0.822,-0.379)
  rect 0.9x1.2 smd mask+0.01: 1(-1.832,0.921) 2(1.766,0.923)
  rect 1.27x0.9 smd mask+0.01: 3(-2.303,-0.92) 4(2.304,-0.923)
  Keep-Out Layer circle w0.05: c0.822,-0.379 r0.3
  Keep-Out Layer circle w0.05: c-0.881,-0.375 r0.3
  silkscreen extent -2.96,-2.53 2.96,1.52, body extent -2.38,-2.54 2.32,1.11, height 1.85
SW-SMD_4P-L6.0-W6.0-P4.50-LS9.0_H5.0 [mm] "6*6"
  rect 2.301x1.501 smd mask+0.01: 1(-4.549,2.25) 2(4.549,2.25) 3(-4.549,-2.25) 4(4.549,-2.25)
  silkscreen extent -3,-3 3,3
TP_1.0MM#1 [mm] "焊盘"
  round 1 smd mask+0.01: 1(0,0)
TP_1.0MM#2 [mm] "焊盘"
  round 1 smd mask+0.01: 1(-0.167,0.017)
TP_1.0MM#3 [mm] "焊盘"
  round 1 smd mask+0.01: 1(-0.536,0.133)
TP_1.0MM#4 [mm] "焊盘"
  oval 1.3x0.6 smd rot 45 mask+0.01: 1(0,0)
TXW827-C08 [mm] "QFN68"
  rect 0.9x0.19 smd paste+0 mask+0.01: 1(-3.5,2.8) 2(-3.5,2.45) 3(-3.5,2.1) 4(-3.5,1.75) 5(-3.5,1.4) 6(-3.5,1.05) 7(-3.5,0.7) 8(-3.5,0.35) 9(-3.5,0) 10(-3.5,-0.35) 11(-3.5,-0.7) 12(-3.5,-1.05) 13(-3.5,-1.4) 14(-3.5,-1.75) 15(-3.5,-2.1) 16(-3.5,-2.45) 17(-3.5,-2.8) 35(3.5,-2.8) 36(3.5,-2.45) 37(3.5,-2.1) 38(3.5,-1.75) 39(3.5,-1.4) 40(3.5,-1.05) 41(3.5,-0.7) 42(3.5,-0.35) 43(3.5,0) 44(3.5,0.35) 45(3.5,0.7) 46(3.5,1.05) 47(3.5,1.4) 48(3.5,1.75) 49(3.5,2.1) 50(3.5,2.45) 51(3.5,2.8)
  rect 0.19x0.9 smd paste+0 mask+0.01: 18(-2.8,-3.5) 19(-2.45,-3.5) 20(-2.1,-3.5) 21(-1.75,-3.5) 22(-1.4,-3.5) 23(-1.05,-3.5) 24(-0.7,-3.5) 25(-0.35,-3.5) 26(0,-3.5) 27(0.35,-3.5) 28(0.7,-3.5) 29(1.05,-3.5) 30(1.4,-3.5) 31(1.75,-3.5) 32(2.1,-3.5) 33(2.45,-3.5) 34(2.8,-3.5) 52(2.8,3.5) 53(2.45,3.5) 54(2.1,3.5) 55(1.75,3.5) 56(1.4,3.5) 57(1.05,3.5) 58(0.7,3.5) 59(0.35,3.5) 60(0,3.5) 61(-0.35,3.5) 62(-0.7,3.5) 63(-1.05,3.5) 64(-1.4,3.5) 65(-1.75,3.5) 66(-2.1,3.5) 67(-2.45,3.5) 68(-2.8,3.5)
  rect 4.5x4.5 smd paste+0 mask+0.01: 69(0,0)
  silkscreen extent -4.32,-3.5 3.5,3.59, body extent -3.5,-3.5 3.5,3.5, height 1
TYPE-C-SMD_TYPE-C-31-M-16 [mm] "8.64定位脚距"
  oval 1.1x1.7 hole 0.6 slot 1.2 at 90 deg paste+0 mask+0.01: 1(-4.32,6.4) 2(-4.32,2.7) 3(4.32,2.7) 4(4.32,6.4)
  rect 0.7x1.5 smd mask+0.01: CC1(-0.5,7.1) CC2(0.506,7.1)
  rect 0.9x1.5 smd mask+0.01: GND(-2.75,7.1) GND(2.75,7.1)
  rect 0.8x1.5 smd mask+0.01: VBUS(-1.52,7.1) VBUS(1.52,7.1)
  silkscreen extent -4.5,0 4.5,6.9, body extent -4.47,0.09 4.47,6.89, height 3.16
晶振SMD-Y3225_4P [mm] "晶振SMD-Y3225"
  rect 1.2x1 smd mask+0.01: 1(-1,-0.8) 2(1,-0.8) 3(1,0.8) 4(-1,0.8)
  silkscreen extent -2.31,-1.46 1.78,1.46, body extent -1.6,-1.25 1.6,1.25, height 0.81

## Part data
C1 C2 C6 C13 C19 C20: library part C0603, "贴片电容", JLCPCB Part Class="Basic Part", LCSC Part Name="100nF ±10% 50V", Manufacturer=YAGEO(国巨), Manufacturer Part=CC0603KRX7R9BB104, Temperature Coefficient=X7R, Tolerance=±10%, Voltage Rated=50V, Add into BOM=yes, Convert to PCB=yes, Datasheet=https://atta.szlcsc.com/upload/public/pdf/source/20180910/C282072_33301C7F631E79921B82A8DAC6BCC5B3.pdf, Device=CC0603KRX7R9BB104, Supplier=LCSC, Supplier Footprint=0603, Supplier Part=C14663, Symbol=CC0603KRX7R9BB104
C3 C4 C5 C7 C8 C9 C10 C11 C12 C16 C17 C18 C21 C22 C23 C24 C25 C26 C27 C28 C29 C30 C31 C32 C33 C34 C35 C36 C37 C38 C39 C40 C41 C42 C43 C44 C45 C46 C47 C48 C49 C50 C51 C52 C53 C54 C55 C56 C57 C58 C59 C60 C61 C62 C63 C65 C66 C67 C68 C69 C71 CC1 CC2: library part C0402, "贴片电容"
C14 C15 C72: library part "Cap Pol1", "贴片铝电解电容", LatestRevisionDate=17-Jul-2002, LatestRevisionNote="Re-released for DXP Platform.", PackageDescription="Polarized Capacitor (Radial); 2 Leads", PackageReference=RB7.6-15, Published=8-Jun-2000, Publisher="Altium Limited"
C64 C70 CB1 CB2: library part C1206, "贴片电容"
D1 D3 D6 D8: library part DIODE_2019, "二极管", PCB DECAL=SOD-123, Source_Path="D:\GP6\SCHEMATIC\GPL32300 MINIDVR\GP32300 MINIDVR V0.1 WITH MIC_20090716_GPY0050A.DSN"
D2 D7: "一对串联肖特基二极管"
D4: library part DIODE_2019, "肖特基二极管", PCB DECAL=SOD-123, Source_Path="D:\GP6\SCHEMATIC\GPL32300 MINIDVR\GP32300 MINIDVR V0.1 WITH MIC_20090716_GPY0050A.DSN"
D5: "肖特基二极管"
J1 J6 J7 J8 J9 J10 J11 M1 M2 RX1 T1 T2 TP1 TX1: library part JTP1, "焊盘"
J2: library part JFPC50PCS, "FPC50脚座子"
J12: library part BTAT, "连接座", JLCPCB Part Class="Extended Part", LCSC Part Name="电池底座 适用电池:CR2032 白色", Manufacturer=MYOUNG(美阳), Manufacturer Part=BS-06-B4AA002, Operating Temperature Range=-25℃~+85℃, Add into BOM=yes, Battery Type=CR2032, Connector Type=电池底座, Convert to PCB=yes, Datasheet=https://atta.szlcsc.com/upload/public/pdf/source/20201218/C964756_801287CA93BF8BF80FAF4AB66101D13D.pdf, Device=BS-06-B4AA002, Supplier=LCSC, Supplier Footprint=SMD, Supplier Part=C964756, Symbol=BS-06-B4AA002
L1 L5: library part L0805, "功率贴片电感", DC Resistance (DCR)=600mΩ, Frequency - Self Resonant=75MHz, JLCPCB Part Class="Extended Part", LCSC Part Name="1uH ±10%", Manufacturer=YJYCOIN(益嘉源), Manufacturer Part=YL160808-1R0K, Q @ Freq=35@10MHz, Rated Current=25mA, Ratings=-, Tolerance=±10%, Add into BOM=yes, Convert to PCB=yes, Datasheet=https://atta.szlcsc.com/upload/public/pdf/source/20210615/C2839970_ABC794F14AEDE076178322CDBBF81D48.pdf, Device=YL160808-1R0K, Saturation Current (Isat)=-, Supplier=LCSC, Supplier Footprint=0603, Supplier Part=C2839970, Symbol=YL160808-1R0K
L3 L4: library part L0402, "贴片电感"
L6 L7: library part L0603, "贴片电阻", DC Resistance (DCR)=600mΩ, Frequency - Self Resonant=75MHz, JLCPCB Part Class="Extended Part", LCSC Part Name="1uH ±10%", Manufacturer=YJYCOIN(益嘉源), Manufacturer Part=YL160808-1R0K, Q @ Freq=35@10MHz, Rated Current=25mA, Ratings=-, Tolerance=±10%, Add into BOM=yes, Convert to PCB=yes, Datasheet=https://atta.szlcsc.com/upload/public/pdf/source/20210615/C2839970_ABC794F14AEDE076178322CDBBF81D48.pdf, Device=YL160808-1R0K, Saturation Current (Isat)=-, Supplier=LCSC, Supplier Footprint=0603, Supplier Part=C2839970, Symbol=YL160808-1R0K
L8 L9: library part L0603, "贴片电感", DC Resistance (DCR)=600mΩ, Frequency - Self Resonant=75MHz, JLCPCB Part Class="Extended Part", LCSC Part Name="1uH ±10%", Manufacturer=YJYCOIN(益嘉源), Manufacturer Part=YL160808-1R0K, Q @ Freq=35@10MHz, Rated Current=25mA, Ratings=-, Tolerance=±10%, Add into BOM=yes, Convert to PCB=yes, Datasheet=https://atta.szlcsc.com/upload/public/pdf/source/20210615/C2839970_ABC794F14AEDE076178322CDBBF81D48.pdf, Device=YL160808-1R0K, Saturation Current (Isat)=-, Supplier=LCSC, Supplier Footprint=0603, Supplier Part=C2839970, Symbol=YL160808-1R0K
L10 L11: library part L-PW, "功率贴片电感"
LED1: library part LED, "贴片LED灯"
LED2: library part LED0603, "贴片LED灯"
MIC1: library part MIC4013_SMD, "连接座", PCB DECAL=MIC_SMD_4013
Q1: library part NMOS, "NMOS管"
Q2 Q4: library part COMS-P, "MOS管", Part Number=TFFDM3401TD-R, PCB DECAL=SOT23-GDS
Q3: library part NPN, "三极管", PCB DECAL=SOT-23/2
R1 R3 R20 R21 R22 R23 R25 R53 R70 R71 R72 R73 R74: library part R0603, "贴片电阻"
R2 R4 R63: library part R1206, "贴片电阻"
R5 R6 R7 R8 R9 R10 R12 R13 R14 R15 R16 R17 R18 R19 R24 R26 R27 R28 R29 R30 R31 R32 R33 R34 R35 R36 R37 R38 R39 R40 R41 R42 R43 R44 R45 R46 R47 R48 R49 R50 R51 R52 R54 R55 R56 R57 R58 R59 R60 R61 R62 R64 R65 R66 R68 R69 RR1 RR2: library part R0402, "贴片电阻"
R11: library part Component_1, "可调电阻"
R67: library part RES2, "贴片电阻"
RF1: "天线连接器", Frequency-Max=-, JLCPCB Part Class="Extended Part", LCSC Part Name="IPEX 内针", Manufacturer=XUNPU(讯普), Add into BOM=yes, Connector Type=板端, Convert to PCB=yes, Datasheet=https://atta.szlcsc.com/upload/public/pdf/source/20201225/C920232_F6993E9201B9F762296BC7632E0E4DFC.pdf, Device=SP-RF-001, Impedance=-, Interface Diameter=2mm, Interface Length/Height=1.25mm, Interface Type=内针, Manufacturer Part=SP-RF-001, Number of Ports=1, Operating Temperature Range=-, RF Series=IPEX, Style=-, Supplier=LCSC, Supplier Footprint=SMD, Supplier Part=C920232, Symbol=SP-RF-001
SD1: "SD卡槽"
SP1: library part SP, "连接座"
SW1 SW2 SW3 SW4 SW5 SW6 SW7 SW8: library part TS-1071AD-A1B3-D4, "轻触开关", JLCPCB Part Class="Extended Part", LCSC Part Name=轻触开关4.0*3.0*2两脚贴片无柱小龟250gf, Manufacturer=Yuandi(元迪), Operating Force=250gf, Actuator Style=圆形按钮, Add into BOM=yes, Circuit=单刀单掷, Convert to PCB=yes, Datasheet=https://atta.szlcsc.com/upload/public/pdf/source/20200316/C492878_F665FC46291D1CEBBF5F4DDB4422506A.pdf, Device=TS-1071AD-A1B3-D4, Manufacturer Part=TS-1071AD-A1B3-D4, Mechanical Life=-, Mounting Style=-, Supplier=LCSC, Supplier Footprint=-, Supplier Part=C492878, Switch Height=2mm, Switch Length=4mm, Switch Width=3mm, Symbol=TS-1071AD-A1B3-D4, With Lamp=-
TYPE1: library part TYPE-C-6P, "TYPE-C 6P连接器"
U1 U6: "升压芯片4A", JLCPCB Part Class="Extended Part", Manufacturer=西安航天民芯, Add into BOM=yes, Convert to PCB=yes, Datasheet=https://atta.szlcsc.com/upload/public/pdf/source/20211213/953A62CC1033762E00AABAD4906DD7F1.pdf, Device=MT3608L, LCSC Part Name=MT3608L, Manufacturer Part=MT3608L, Supplier=LCSC, Supplier Footprint=SOT-23-6, Supplier Part=C2932326, Symbol=MT3608L
U5: "TXW827-C08芯片"
U7: library part XA8002D/LPA4871SOF, "功放IC"
U8: library part XT25F32BSOIGT-S, "闪存SOP8", Clock Frequency (fc)=108MHz, JLCPCB Part Class="Extended Part", LCSC Part Name="32Mbit SPI Nor Quad I/O", Manufacturer=XTX(芯天下), Standby supply current=100nA, Supply Current (Erase)=30mA, Supply Current (Read)=20mA, Supply Voltage=2.7V~3.6V, Add into BOM=yes, Block Erase Time (tBE)=150ms；70ms；250ms, Convert to PCB=yes, Datasheet=https://atta.szlcsc.com/upload/public/pdf/source/20201127/C558850_EF5223A6C8E670CFF9F01DDDEE7E84E5.pdf, Device=XT25F32BSOIGT-S, Interface Type=SPI, Manufacturer Part=XT25F32BSOIGT-S, Memory Size=32Mbit, Page Programming Time (Tpp)=350us, Supplier=LCSC, Supplier Footprint=SOP-8, Supplier Part=C558850, Supply Current (Program)=30mA, Symbol=XT25F32BSOIGT-S
U9 U11: library part TLV62568DBVR, "降压IC"
U10: library part TP4056_C725790, "充电IC"
X1: library part ZTB_1, "无源晶振"

## Free pads (board coordinates)
  round 2.6 hole 2.6 unplated mask+0.01: 0(4.439,90.691) 0(14.989,17.091) 0(81.389,17.941)
  round 1.5 hole 1.5 unplated mask+0.01: 0(14.989,13.591)
  round 1.2 hole 0.7 unplated mask+0.01: 2(70.394,38.583)

## Via types
v1: diameter 0.5, hole 0.3, Top Layer to Bottom Layer, tented both sides, 376 vias
v2: diameter 0.6, hole 0.4, Top Layer to Bottom Layer, tented both sides, 42 vias
v3: diameter 0.45, hole 0.3, Top Layer to Bottom Layer, tented both sides, 23 vias

## Nets (pads, with @x,y where several pads share a name; then routed paths per layer and width w, separated by ;. In a path a pad name is that pad's centre, name@x,y a point inside that pad or via, vN(x,y) a via of type N, cw(c..) or ccw(c..) an arc to the next point about the centre after c; other vN are vias at no path point)
4V2: C22.1 C27.1 J2.6 J2.46 J7.1 R11.2 R21.1 R23.2 | length 40.1
  Top Layer w0.3: R23.2@63.284,10.841 R23.2@63.284,10.791 ; J7.1@64.604,9.657 63.627,9.657 R21.1@63.338,9.368 63.284,9.421 R23.2@63.284,10.791 ; v2(69.312,9.189) 69.312,9.801 ; C27.1@71.222,9.801 69.312,9.801 ; R23.2@63.284,10.791 67.234,10.791 R11.2@67.476,10.548 68.223,9.801 69.312,9.801
  Bottom Layer w0.3: v2(69.312,9.189) 70.695,9.189 71.021,8.862 ; J2.46@71.798,10.114 71.798,9.221 71.483,8.906 71.065,8.906 71.021,8.862 ; J2.6@91.798,10.114 91.798,7.907 90.791,6.9 72.358,6.9 71.021,8.237 71.021,8.862
9V6: C26.1 D2.1 J2.43 J6.1 R20.2 R21.2 | length 43.2
  Top Layer w0.5: R20.2@41.178,17.01 42.476,15.712 42.476,13.477 D2.1@43.4,12.553 ; R20.2@41.32,17.239 51.019,17.239 J6.1@51.627,16.632 52.235,16.024 52.235,14.859 58.642,8.451 63.248,8.451 72.352,8.451 72.372,8.471 C26.1@72.372,8.526 72.387,8.541 73.057,8.541 73.17,8.654 v2(73.197,8.654)
  Bottom Layer w0.3: v2(73.197,8.654) 73.197,8.735 73.297,8.835 J2.43@73.297,10.114
18V: C6.2 C24.1 D6.1 J2.41 R70.1 R71.2 T1.1 | length 40.6
  Top Layer w0.3: v2(75.212,8.705) 75.217,8.71 75.217,9.871 C24.1@75.222,9.876
  Top Layer w0.5: R70.1@45.858,13.52 R71.2@45.858,12.317 47.699,12.317 49.644,12.317 D6.1@49.68,12.281 51.258,12.281 51.291,12.247 52.269,12.247 T1.1@59.521,4.995 73.267,4.995 75.212,6.94 v2(75.212,8.705) 75.212,9.866 C24.1@75.217,9.871
  Bottom Layer w0.3: J2.41@74.298,10.114 74.298,9.165 74.701,8.762 75.155,8.762 v2(75.212,8.705)
+5V: C66.2 D4.1 Q4.1 R53.2 R56.2 R68.2 TYPE1.VBUS U10.4 U10.8 | length 94.1
  Top Layer w0.2: v1(3.512,27.373) v1@3.549,27.41 ; R53.2@6.045,25.266 R53.2@6.06,25.281
  Top Layer w0.3: TYPE1.VBUS@5.67,40.786 9.539,40.786 10.484,41.731 R56.2@10.484,42.542 ; R53.2@6.045,25.266 6.762,25.266 v1(6.782,25.246) ; R53.2@6.058,25.283 R53.2@6.06,25.281 ; v1(10.586,25.242) 12.085,25.242 13.151,26.309 U10.8@13.151,27.792 ; R68.2@21.105,3.779 21.105,5.096 Q4.1@21.473,5.464 21.78,5.157 22.036,5.157 23.446,3.747 24.013,3.747 D4.1@24.051,3.709
  Top Layer w0.8: v1(3.508,22.603) 3.508,5.646 7.616,1.538 22.023,1.538 23.871,3.387 24.263,3.387 D4.1@24.318,3.442 ; v1(3.512,27.373) v1(3.512,28.187) 3.512,30.219 6.45,33.157 U10.4@9.341,33.157 C66.2@9.341,35.77 ; TYPE1.VBUS@5.67,40.786 4.476,40.786 4.007,40.318 4.007,38.215 4.476,37.746 8.201,37.746 9.311,36.636 C66.2@9.311,35.85
  Bottom Layer w0.3: v1(3.512,27.373) 3.566,27.373 3.714,27.225 4.803,27.225 v1(6.782,25.246) 6.784,25.244 10.584,25.244 v1(10.586,25.242)
  Bottom Layer w0.8: v1(3.511,21.974) v1(3.512,27.373) v1(3.512,28.187)
-6V: C13.2 C25.1 D8.2 J2.42 R72.1 R73.2 T2.1 | length 34.8
  Top Layer w0.3: C25.1@73.874,9.401 73.874,8.573 74.083,8.364 v2(74.083,8.283)
  Top Layer w0.5: R73.2@45.858,11.114 R72.1@45.858,9.912 49.025,9.912 51.508,7.429 54.911,7.429 55.046,7.293 55.352,7.293 v2(55.372,7.274) ; D8.2@49.198,9.658 D8.2@49.198,9.699 ; v2(59.31,6.824) 73.091,6.824 74.083,7.816 v2(74.083,8.283)
  Bottom Layer w0.3: J2.42@73.797,10.114 73.797,8.649 74.083,8.364 v2(74.083,8.283)
  Bottom Layer w0.5: v2(55.372,7.274) 58.833,7.274 59.283,6.824 v2(59.31,6.824)
AGND: C30.2 C31.2 C32.2 C36.2 C37.2 C38.2 C42.1 C43.2 C44.2 L6.2 R44.1 U5.22 U7.7 | length 42.2
  Top Layer w0.2: v1(60.706,40.33) 60.787,40.33 61.134,39.983 U5.22@66.894,39.983 ; C32.2@61.824,55.768 v1(62.951,55.768) v1(64.078,55.768) C30.2@64.655,55.19
  Top Layer w0.6: L6.2@45.553,76.267 v1@47.57,76.267 ; v1(51.188,79.308) 51.188,78.462 51.233,78.417 U7.7@51.233,74.068
  Bottom Layer w0.2: v1(55.932,49.912) 56.126,50.106 56.126,50.212 56.126,51.023 56.581,51.478 57.375,51.478 57.375,51.475 v1@57.803,51.047 ; v1(57.803,51.271) v1@57.803,51.047 ; v1(60.706,40.33) 61.242,39.794 61.708,39.794 62.293,40.379 v1(62.293,41.749) 62.293,46.557 v1@57.803,51.047
  Bottom Layer w0.6: 46.569,76.276 47.988,76.276 48.681,76.969 48.681,78.363 49.791,79.474 50.676,79.474 v1(51.132,79.93) ; v1@51.182,79.88 51.182,79.313 v1(51.188,79.308)
  other v1: 66.662,53.312 66.11,55.753 57.805,56.244 57.584,57.306 62.174,57.485 50.173,60.514 55.539,60.531 57.526,60.985 61.518,61.657 50.367,63.254 56.446,64.469 49.542,66.362 61.571,67.982 56.357,67.997 48.379,68.942 52.28,71.514 47.085,72.14 56.613,73.874 61.492,75.671 46.869,76.272 47.57,76.274 57.884,81.81 61.596,81.844
ANT: C18.2 L3.2 U5.68 | length 4.8
  Top Layer w0.2: U5.68@73.894,41.383 74.089,41.578 74.152,41.578
  Top Layer w0.6: 74.152,41.578 74.227,41.653 74.629,41.653 C18.2@76.621,43.645 L3.2@77.395,44.418
ANT1: C16.1 C17.2 L3.1 | length 5.4
  Top Layer w0.6: L3.1@78.102,45.143 78.12,45.161 78.13,45.161 C17.2@78.979,46.009 79.859,46.889 cw(c81.139,45.609) 81.139,47.42 C16.1@82.68,47.42
ANT2: C16.2 L4.2 RF1.1 TP1.1 | length 7.4
  Top Layer w0.6: C16.2@83.63,47.42 83.63,47.413 TP1.1@85.741,47.413 L4.2@89.167,47.413 90.395,47.413 91.009,47.413
AUDIO_VDD: C50.1 RR1.2 U5.15 | length 12.8
  Top Layer w0.2: v1(64.64,51.325) v1@64.645,51.329 ; C50.1@66.796,44.314 C50.1@66.782,44.3 66.938,44.144 66.938,43.847 67.546,43.24 67.84,43.24 68.294,42.786 68.294,42.493 U5.15@68.294,42.083
  Top Layer w0.4: v1@64.645,51.329 RR1.2@64.645,52.005 ; C50.1@66.796,44.314 67.515,44.314 67.615,44.414 v1(67.642,44.414)
  Bottom Layer w0.4: v1(64.64,51.325) 66.018,49.947 66.018,46.54 67.642,44.915 v1(67.642,44.414)
AVDD: C19.1 C72.1 L5.1 R74.2 U6.5 | length 15.4
  Top Layer w0.8: R74.2@25.079,15.621 25.079,16.827 24.242,17.664 24.242,18.818 C72.1@24.042,19.018 24.188,18.872 25.373,18.872 27.435,16.81 28.119,16.81 28.119,15.531 29.511,14.139 29.511,13.179 L5.1@29.911,12.779 ; C19.1@28.119,16.795 U6.5@29.974,16.795
AVDD_EN: U5.37 U6.4 | length 59.3
  Top Layer w0.15: U6.4@29.974,17.745 29.715,18.004 29.715,21.835 32.463,24.583 42.253,24.583 42.428,24.758 v1(49.938,24.758) ; v1(66.581,21.527) 67.125,21.527 68.286,22.688 68.286,27.966 68.294,27.973 U5.37@68.294,35.083
  Bottom Layer w0.15: v1(49.938,24.758) 49.938,22.796 50.093,22.641 50.266,22.641 50.289,22.617 59.044,22.617 60.124,21.537 65,21.537 65.01,21.527 v1(66.581,21.527)
B0: J2.19 U5.10 | length 77.4
  Top Layer w0.2: v1(57.299,13.098) 57.308,13.107 57.308,42.572 61.09,46.354 68.411,46.354 70.044,44.722 U5.10@70.044,42.083
  Bottom Layer w0.2: v1(57.299,13.098) 58.837,13.098 59.048,13.309 83.678,13.309 85.299,11.689 J2.19@85.299,10.114
B1: J2.18 U5.9 | length 79
  Top Layer w0.2: v1(56.808,14.027) 56.808,42.642 60.87,46.704 68.582,46.704 70.394,44.893 U5.9@70.394,42.083
  Bottom Layer w0.2: v1(56.808,14.027) 57.176,13.659 83.823,13.659 85.796,11.686 J2.18@85.796,10.114
B2: J2.17 U5.8 | length 80.4
  Top Layer w0.2: v1(56.25,15.634) 56.198,15.686 56.198,42.583 60.67,47.054 68.727,47.054 70.744,45.038 U5.8@70.744,42.083
  Bottom Layer w0.2: v1(56.25,15.634) 57.819,14.064 83.917,14.064 86.297,11.685 J2.17@86.297,10.114
B3: J2.16 U5.7 | length 82
  Top Layer w0.2: v1(55.685,16.929) 55.685,42.659 60.43,47.404 68.916,47.404 71.094,45.226 U5.7@71.094,42.083
  Bottom Layer w0.2: v1(55.685,16.929) 58.151,14.463 84.096,14.463 86.797,11.762 J2.16@86.797,10.114
B4: J2.15 U5.6 | length 84
  Top Layer w0.2: v1(55.185,17.703) 55.239,17.757 55.239,18.253 55.256,18.27 55.256,42.936 60.073,47.754 69.078,47.754 71.444,45.389 U5.6@71.444,42.083
  Bottom Layer w0.2: v1(55.185,17.703) 55.861,17.703 58.69,14.874 84.195,14.874 87.298,11.771 J2.15@87.298,10.114
B5: J2.14 U5.5 | length 85.9
  Top Layer w0.2: v1(54.756,18.477) 54.773,18.495 54.773,19.027 54.906,19.159 54.906,43.23 59.78,48.104 69.365,48.104 71.794,45.675 U5.5@71.794,42.083
  Bottom Layer w0.2: v1(54.756,18.477) 55.817,18.477 59.022,15.272 84.402,15.272 87.798,11.876 J2.14@87.798,10.114
B6: J2.13 U5.4 | length 87.4
  Top Layer w0.2: v1(54.378,19.339) 54.378,43.198 59.635,48.454 69.51,48.454 72.144,45.82 U5.4@72.144,42.083
  Bottom Layer w0.2: v1(54.378,19.339) 56.156,19.339 59.853,15.643 84.568,15.643 88.298,11.913 J2.13@88.298,10.114
B7: J2.12 U5.3 | length 89.6
  Top Layer w0.2: v1(53.733,19.998) 53.733,43.047 59.49,48.804 69.674,48.804 72.494,45.984 U5.3@72.494,42.083
  Bottom Layer w0.2: v1(53.733,19.998) 56.117,19.998 60.114,16.001 84.965,16.001 88.799,12.167 J2.12@88.799,10.114
CSI_SCL: R45.2 R48.1 U5.25 | length 80
  Top Layer w0.15: R45.2@19.803,65.826 19.855,65.878 v1(22.557,65.878) ; R48.1@19.871,74.598 19.896,74.598 20.096,74.398 20.096,74.373 24.466,70.002 24.466,65.926 24.349,65.809 24.349,48.535 27.772,45.112 47.15,45.112 v1(48.344,43.917) ; v1@61.426,38.48 61.878,38.933 U5.25@66.894,38.933
  Bottom Layer w0.15: v1(22.557,65.878) 24.324,65.878 v1(24.466,66.021) ; v1(48.344,43.917) 48.806,44.379 52.613,44.379 58.522,38.47 v1(61.343,38.47)
CSI_SDA: R46.2 R47.1 U5.24 | length 71.9
  Top Layer w0.15: R47.1@19.895,69.51 19.895,67.678 19.895,67.646 20.063,67.478 22.199,67.478 23.368,66.309 23.368,48.298 27.154,44.512 45.358,44.512 45.732,44.137 46.18,44.137 46.192,44.126 46.919,44.126 v1(46.931,44.137) ; v1@61.347,39.119 61.511,39.283 U5.24@66.894,39.283
  Bottom Layer w0.15: v1(46.931,44.137) 46.998,44.07 47.518,44.07 48.302,44.854 52.751,44.854 58.448,39.158 v1(61.323,39.158)
DAC_EN: R31.2 U5.38 | length 71.1
  Top Layer w0.15: R31.2@48.415,60.112 48.415,58.79 51.558,55.646 51.558,46.259 50.124,44.825 v2(50.124,42.873) ; v2(50.385,40.103) 50.385,33.012 51.778,31.619 51.778,27.923 52.904,26.796 v1(52.904,21.237) ; v1(66.387,20.75) 66.817,20.75 68.586,22.519 68.586,27.842 68.594,27.849 68.594,34.52 68.624,34.55 68.624,35.063 U5.38@68.644,35.083
  Bottom Layer w0.15: v2(50.124,42.873) 50.124,42.751 50.385,42.49 v2(50.385,40.103) ; v1(52.904,21.237) 64.876,21.237 65.363,20.75 v1(66.387,20.75)
DE: J2.9 U5.51 | length 37.7
  Top Layer w0.2: U5.51@73.194,35.083 73.194,22.462 76.235,19.421 78.843,19.421 80.164,20.741 82.745,20.741 88.811,14.676 v3(88.811,14.619)
  Bottom Layer w0.2: v3(88.811,14.619) 90.297,13.133 J2.9@90.297,10.114
DLCK: J2.37 U5.50 | length 32.6
  Top Layer w0.15: v1(68.819,19.272) 76.229,11.861 76.229,11.582 v3(76.287,11.524) ; U5.50@72.844,35.083 72.844,20.217 v1(73.389,19.672)
  Bottom Layer w0.15: v1(68.819,19.272) 72.989,19.272 v1(73.389,19.672)
  Bottom Layer w0.2: v3(76.287,11.524) 76.292,11.519 76.292,10.119 J2.37@76.297,10.114
EN: Q3.1 R65.2 R67.2 SW7.1 | length 49.2
  Top Layer w0.3: v1(1.963,27.391) 2.645,28.073 2.645,45.552 4.474,47.38 4.474,52.998 3.367,54.105 SW7.1@2.496,54.105 ; v1(6.93,15.831) 6.951,15.81 7.299,15.81 Q3.1@8.771,14.337 9.488,15.054 10.444,15.054 R67.2@10.444,17.121
  Bottom Layer w0.3: v1(1.963,27.391) 1.963,20.798 v1(6.93,15.831)
G0: J2.27 U5.41 | length 32.4
  Top Layer w0.15: v1(69.402,21.545) 69.413,21.556 69.413,21.906 69.68,22.173 69.68,35.069 U5.41@69.694,35.083 ; v1(73.427,21.522) 73.427,20.306 73.864,19.869 73.864,18.937 v3(81.217,11.585)
  Bottom Layer w0.15: v1(69.402,21.545) 69.414,21.533 73.415,21.533 v1(73.427,21.522) ; v3(81.217,11.585) 81.257,11.545 81.257,10.155 J2.27@81.298,10.114
G1: J2.26 U5.40 | length 33.6
  Top Layer w0.15: v1(69.007,20.89) 69.007,20.984 68.812,21.179 68.812,21.793 69.344,22.324 U5.40@69.344,35.083 ; v1(74.036,20.913) 74.036,20.121 74.164,19.993 74.164,19.274 81.79,11.648 81.79,11.15 v3(81.847,11.093)
  Bottom Layer w0.15: v1(69.007,20.89) 69.018,20.901 74.025,20.901 v1(74.036,20.913) ; J2.26@81.798,10.114 81.823,10.138 81.823,11.068 v3(81.847,11.093)
G2: J2.25 U5.39 | length 34.7
  Top Layer w0.15: v1(68.241,20.44) 68.241,21.716 68.994,22.469 U5.39@68.994,35.083 ; v1(74.681,20.178) 74.681,19.308 81.906,12.083 v3(82.225,11.764)
  Bottom Layer w0.15: v1(68.241,20.44) 68.266,20.415 74.35,20.415 74.586,20.178 v1(74.681,20.178) ; v3(82.225,11.764) 82.283,11.706 82.283,11.589 82.299,11.573 J2.25@82.299,10.114
G3: J2.24 U5.27 | length 52.4
  Top Layer w0.15: v1(60.646,18.552) 60.309,18.888 60.309,36.212 62.33,38.233 U5.27@66.894,38.233
  Top Layer w0.153: v1(77.272,17.431) 77.272,17.358 82.814,11.816 82.814,11.08 v3(82.797,11.062)
  Bottom Layer w0.15: v1(60.646,18.552) 60.649,18.548 60.649,18.184 61.669,17.164 76.502,17.164 76.769,17.431 v1(77.272,17.431)
  Bottom Layer w0.153: J2.24@82.797,10.114 v3(82.797,11.062)
G4: J2.23 U5.26 | length 54
  Top Layer w0.15: v1(60.553,17.587) 60.009,18.13 60.009,36.336 62.256,38.583 U5.26@66.894,38.583 ; v1(78.343,17.097) 83.32,12.121 v3(83.32,11.559)
  Bottom Layer w0.15: v1(60.553,17.587) 61.276,16.864 78.015,16.864 78.248,17.097 v1(78.343,17.097)
  Bottom Layer w0.2: J2.23@83.297,10.114 83.308,10.125 83.308,11.548 v3(83.32,11.559)
G5: J2.22 U5.23 | length 57.7
  Top Layer w0.15: v1(60.08,16.784) 59.709,17.154 59.709,38.409 60.934,39.633 U5.23@66.894,39.633 ; v1(79.295,16.817) 79.295,16.729 83.823,12.201 v3(83.823,11.178)
  Bottom Layer w0.15: v1(60.08,16.784) 60.08,16.716 60.456,16.339 78.817,16.339 v1(79.295,16.817) ; J2.22@83.797,10.114 83.81,10.126 83.81,11.166 v3(83.823,11.178)
G6: J2.21 U5.12 | length 74.6
  Top Layer w0.2: v1(58.396,11.459) 58.396,11.522 58.149,11.769 58.149,42.322 61.481,45.654 68.058,45.654 69.344,44.368 U5.12@69.344,42.083
  Bottom Layer w0.2: v1(58.396,11.459) 59.325,11.459 60.441,12.576 83.38,12.576 84.298,11.658 J2.21@84.298,10.114
G7: J2.20 U5.11 | length 76.3
  Top Layer w0.2: v1(57.649,12.187) 57.691,12.23 57.691,12.741 57.799,12.849 57.799,42.467 61.336,46.004 68.209,46.004 69.694,44.519 U5.11@69.694,42.083
  Bottom Layer w0.2: v1(57.649,12.187) 58.678,12.187 59.417,12.926 83.567,12.926 84.798,11.694 J2.20@84.798,10.114